# Altium PCB foc.PcbDoc (part 1 of 2)
Units mil, origin at the board's own origin, x right, y up, seen from the top; angles counter-clockwise.
Board outline 2814.98 x 1889.76 mil, 4 copper layers (Top Layer, GND, VCC, Bottom Layer), stack 23.756 mil thick; 125 components, 87 nets, 460 pads, 520 vias.
Unrouted connection lines stored in the file: 133.
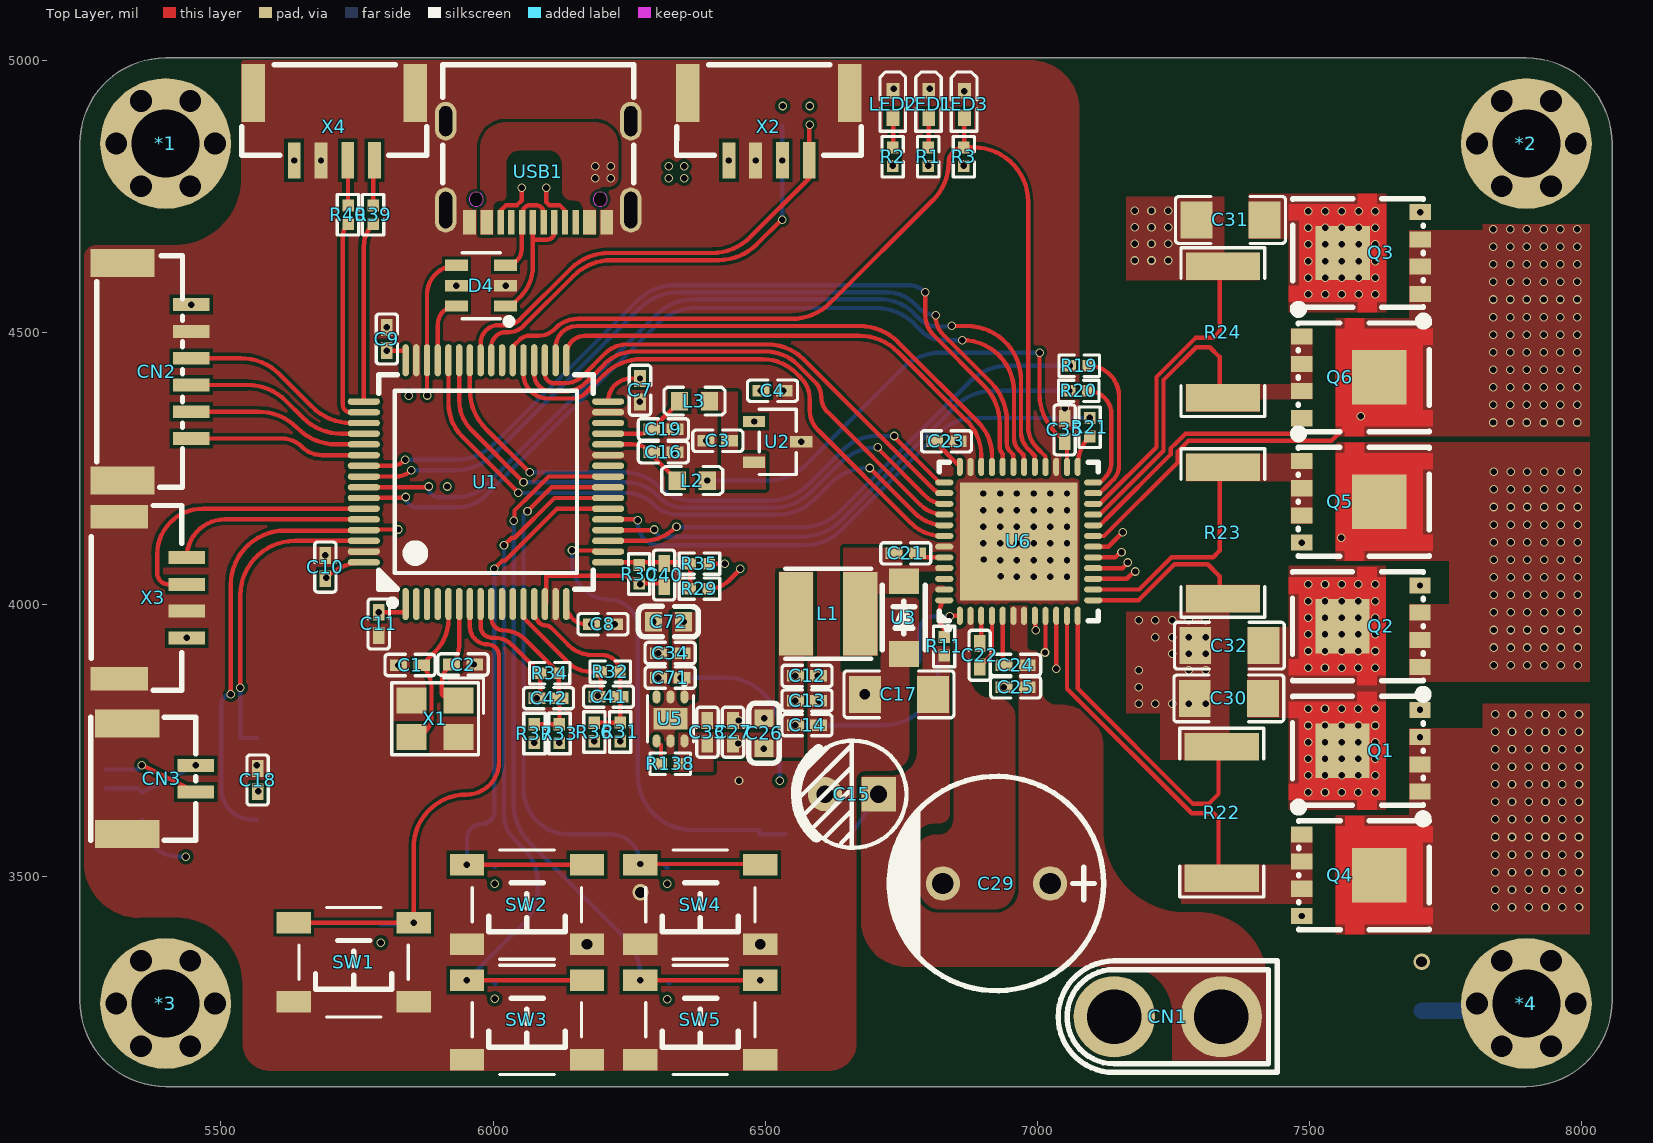
[diagram p0: Top Layer view]
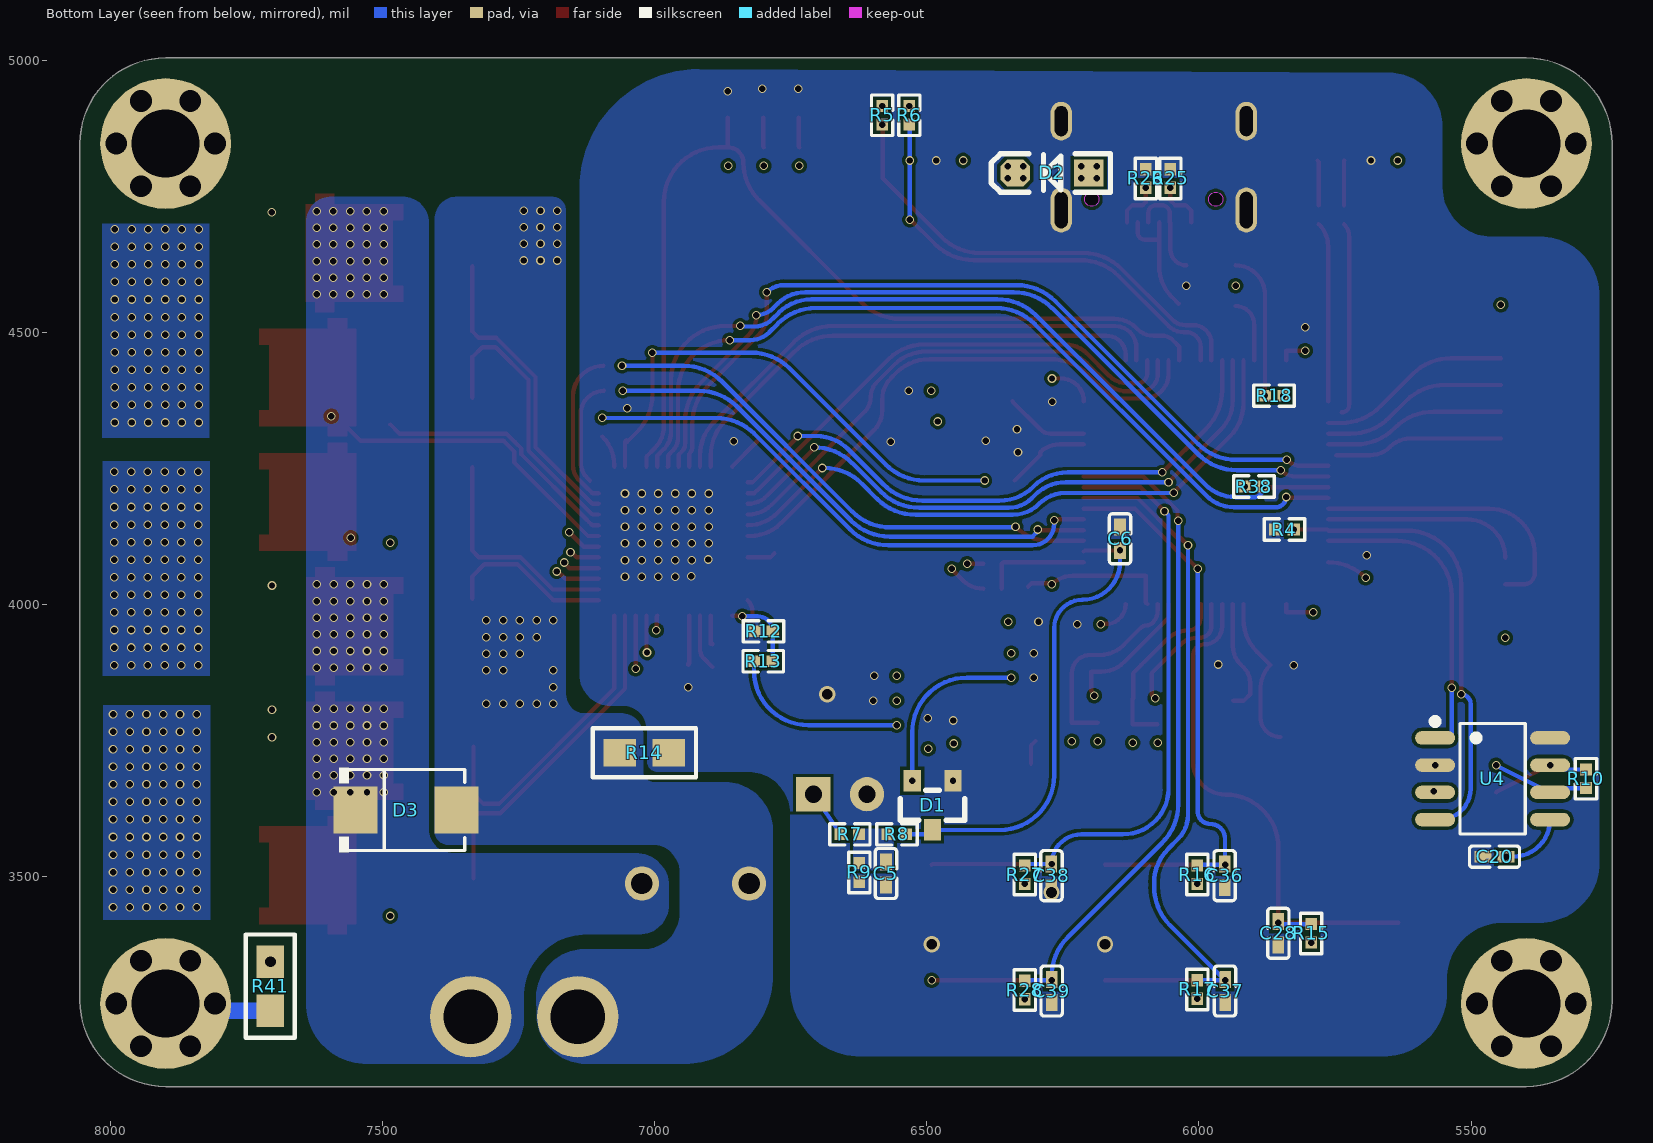
[diagram p1: Bottom Layer view, seen from below]
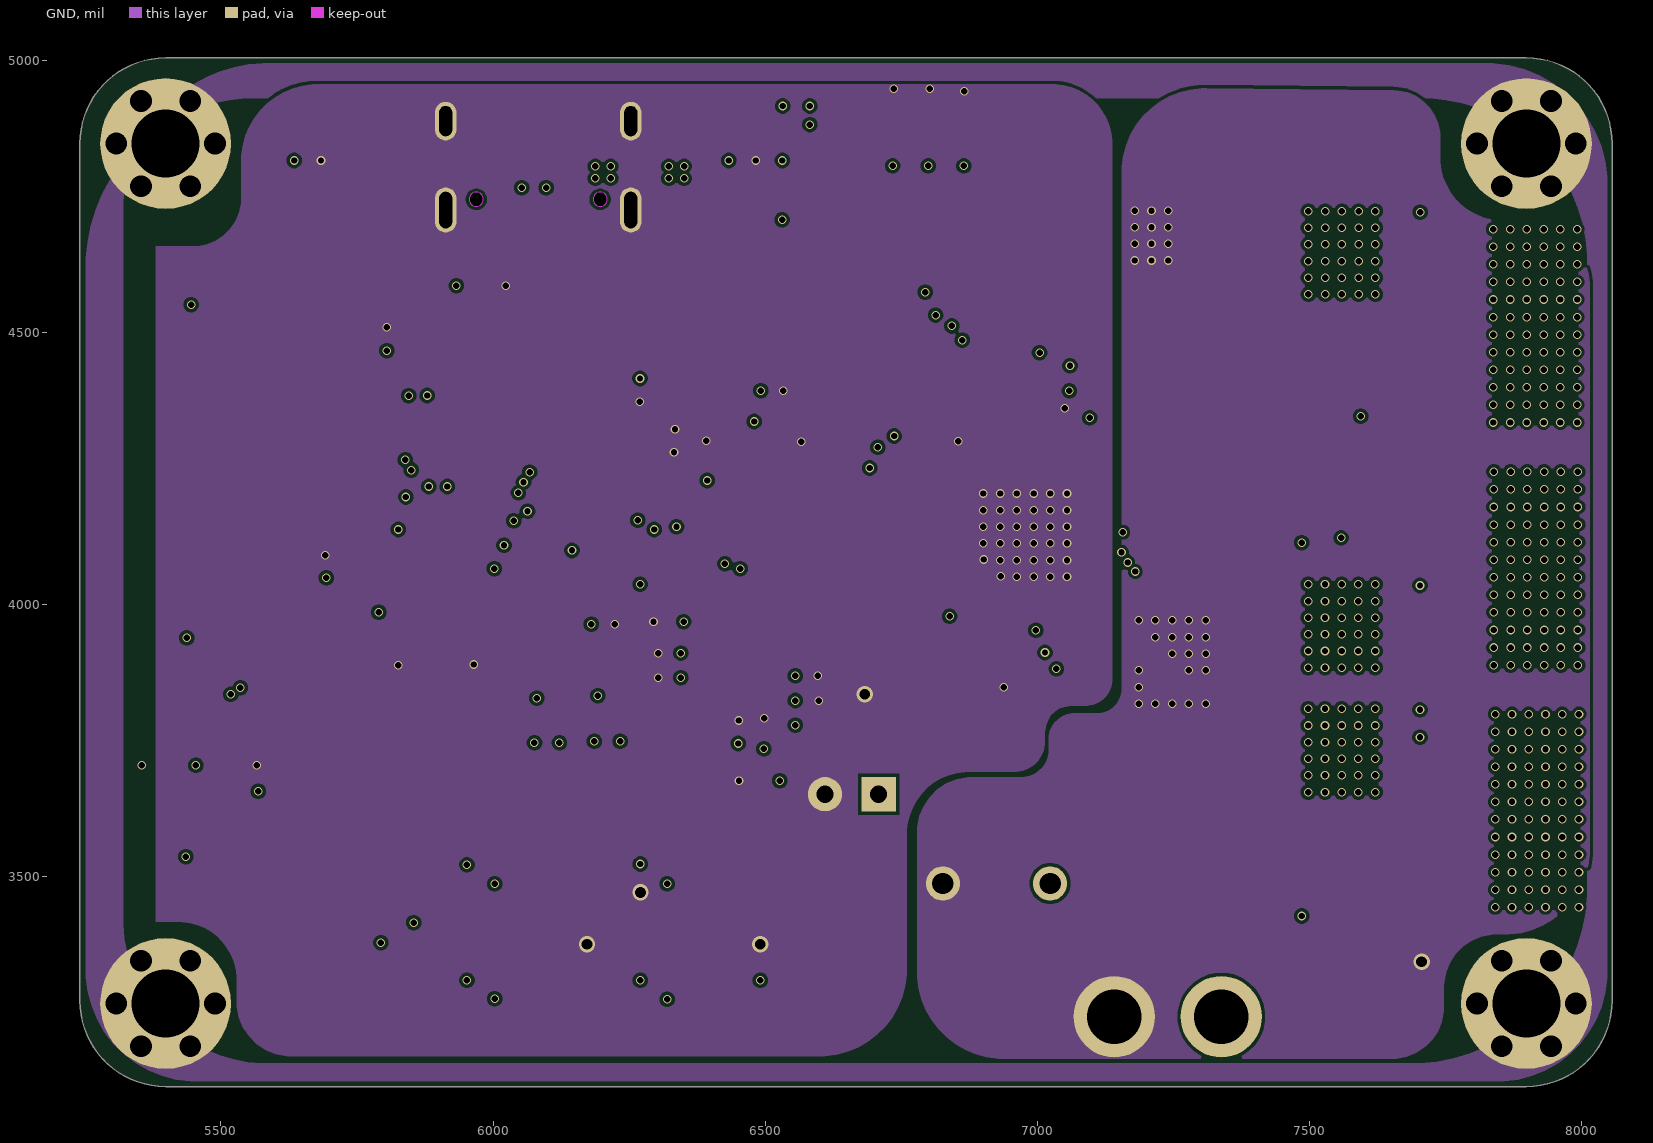
[diagram p2: GND]
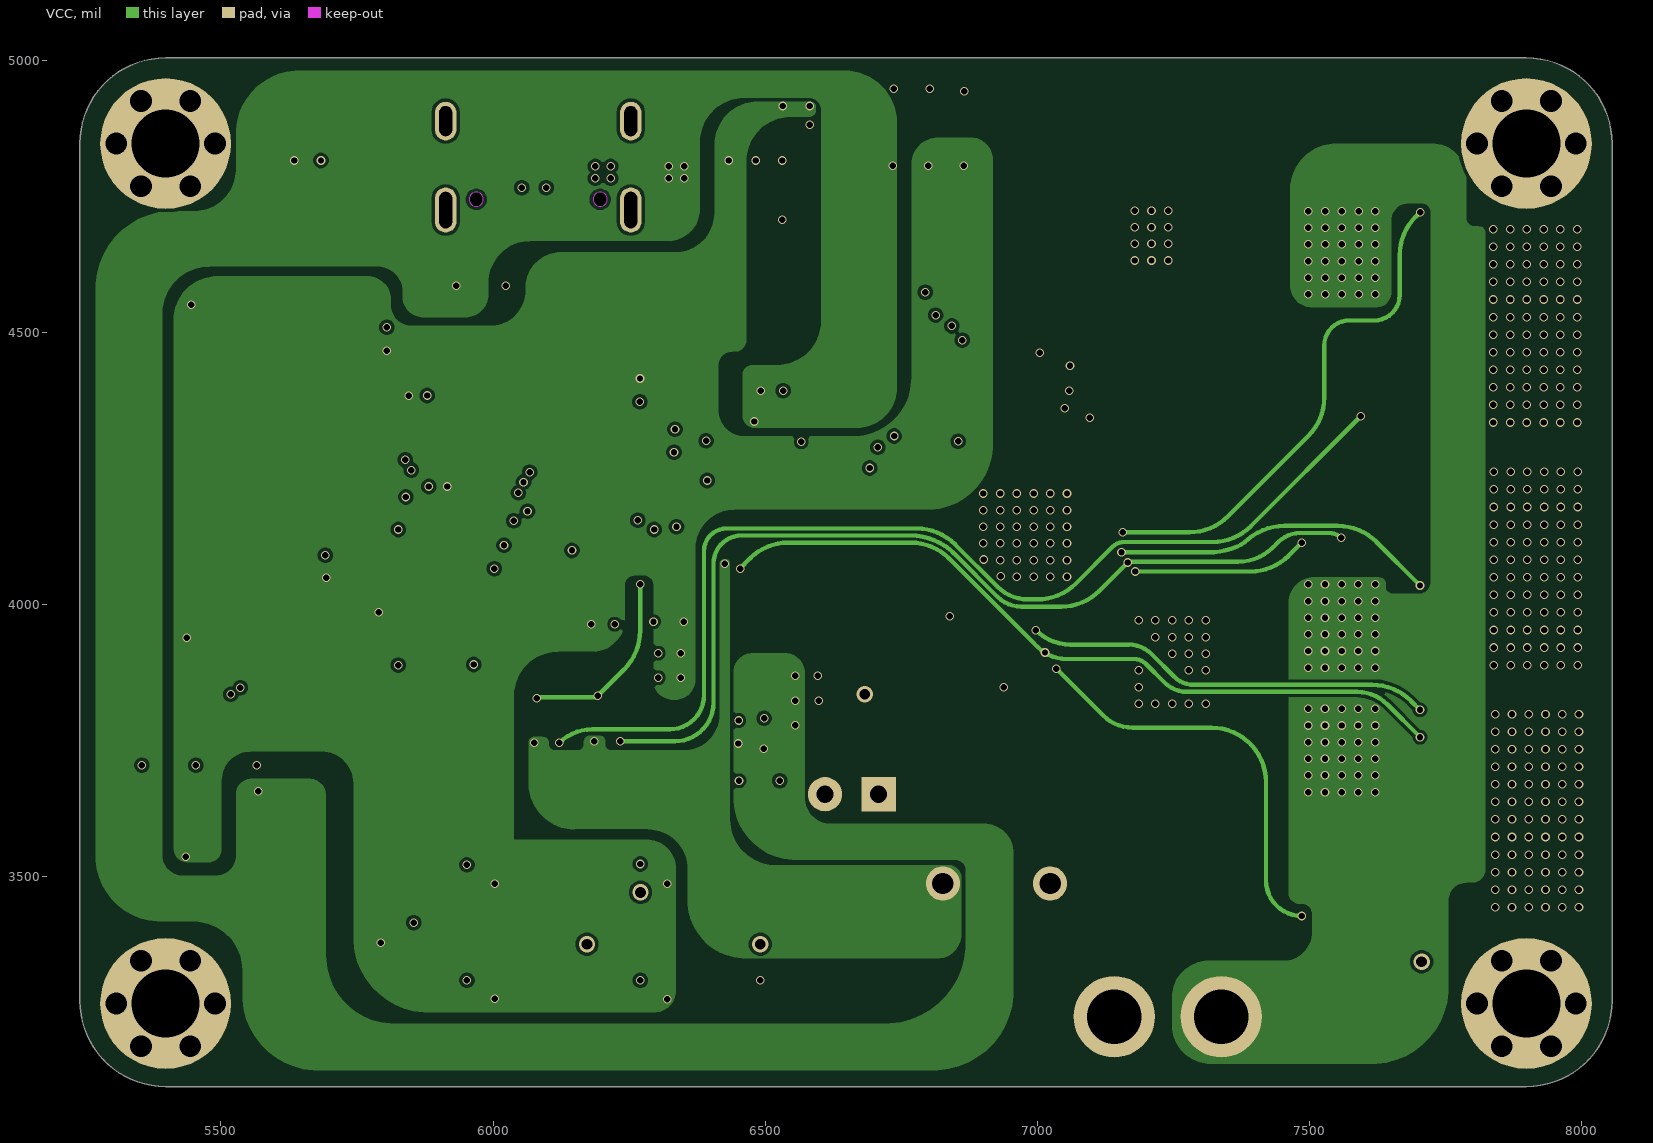
[diagram p3: VCC]

## Layer stack, top to bottom
Top Solder: solder mask 0.4, Solder Resist, Dk 3.5
Top Layer: signal copper 1.4
Dielectric 2: prepreg 2.8, PP-006, Dk 4.1
GND: signal copper 1.378
Dielectric 1: dielectric 12.6, FR-4, Dk 4.8
VCC: signal copper 1.378
Dielectric 3: prepreg 2.8, PP-006, Dk 4.1
Bottom Layer: signal copper 1.4
Bottom Solder: solder mask 0.4, Solder Resist, Dk 3.5

## Board outline
5240.95,3272.2 5240.95,4847 cw(c5398.43,4847) 5398.43,5004.48 7898.45,5004.48 cw(c7898.45,4847) 8055.93,4847 8055.93,3272.2 cw(c7898.45,3272.2) 7898.45,3114.72 5398.43,3114.72 cw(c5398.43,3272.2)
cut-out: 0,0 10,0 10,10 0,10
cut-out: 0,0 10,0 10,10 0,10
cut-out: 0,0 10,0 10,10 0,10
cut-out: 0,0 10,0 10,10 0,10
cut-out: 0,0 10,0 10,10 0,10
cut-out: 0,0 10,0 10,10 0,10
cut-out: 0,0 10,0 10,10 0,10
cut-out: 0,0 10,0 10,10 0,10
cut-out: 0,0 10,0 10,10 0,10
cut-out: 0,0 10,0 10,10 0,10
cut-out: 0,0 10,0 10,10 0,10
cut-out: 0,0 10,0 10,10 0,10

## Design rules (kind name [scope] priority, off if disabled: settings)
Clearance [All] p1: gap=6 ignorepadtopadclearanceinfootprint=FALSE except(5: Arc-Arc Arc-Track Arc-SMDPad Track-Track Track-SMDPad)
ComponentClearance [All] p1: gap=0 collisioncheckmode=3 verticalgap=0 showdistances=FALSE
DiffPairsRouting [InDifferentialPair('No Differential Pair')] p1: maxlimit=500 minlimit=6 mostfreqgap=6 toplayer_minwidth=6 toplayer_maxwidth=11 toplayer_prefwidth=8 midlayer1_minwidth=6 midlayer1_maxwidth=11 midlayer1_prefwidth=8 midlayer2_minwidth=6 midlayer2_maxwidth=11 midlayer2_prefwidth=8 bottomlayer_minwidth=6 bottomlayer_maxwidth=11 bottomlayer_prefwidth=8 maxuncoupledlength=500
PlaneConnect [All] p1: planeconnectstyle=Direct reliefexpansion=20 reliefentries=4 reliefconductorwidth=10 reliefairgap=10
PolygonConnect [All] p1: connectstyle=Direct reliefconductorwidth=10 reliefentries=4 polygonreliefangle="90 Angle" airgapwidth=10
RoutingVias [All] p1: holewidth=28 width=50 viastyle="Through Hole" minholewidth=8 minwidth=8 maxholewidth=900 maxwidth=900
SolderMaskExpansion [IsVia] p1: expansion=4
SupplyNets "Schematic Supply Nets_4" [InNet('3.3V')] p1: voltage=0.000
SupplyNets "Schematic Supply Nets_3" [InNet('SNA')] p2: voltage=0.000
SupplyNets "Schematic Supply Nets_2" [InNet('VREF')] p3: voltage=0.000
SupplyNets "Schematic Supply Nets_1" [InNet('5V')] p4: voltage=0.000
SupplyNets "Schematic Supply Nets" [InNet('GND')] p5: voltage=0.000
Width [All] p1: maxlimit=500 minlimit=6 preferedwidth=8 toplayer_maxwidth=8 bottomlayer_maxwidth=8 minimp=50.000000 maximp=50.000000 favimp=50.000000
27 further rules are at their usual default settings.

## Components (designator, comment, footprint, x,y, rotation, side; value= is the part's Value field where it differs from the comment)
*1 "M3_1" "M3 125X250" 5398.43,4847 r0 top
*2 "M3_1" "M3 125X250" 7898.45,4847 r0 top
*3 "M3_1" "M3 125X250" 5398.43,3267.2 r0 top
*4 "M3_1" "M3 125X250" 7898.45,3267.2 r0 top
C1 "15pf" C0402 5847.54,3889 r0 top
C2 "15pf" C0402 5945,3890 r0 top
C3 "1uf" C0402 6413,4301 r180 top
C4 "1uf" C0402 6513.54,4393 r0 top
C5 "100nf" C0402 6575,3506 r270 bottom
C6 "100nf" C0402 6145,4121 r90 bottom
C7 "100nf" C0402 6270,4394 r270 top
C8 "100nf" C0402 6202,3964 r0 top
C9 "100nf" C0402 5805,4488 r90 top
C10 "100nf" C0402 5692,4069 r90 top
C11 "100nf" C0402 5790,3964.54 r270 top
C12 "22uf" C0402 6576.8,3869.07 r0 top
C13 "22uf" C0402 6576.8,3823.81 r0 top
C14 "1uf" C0402 6576.8,3778.55 r0 top
C15 "PA50V220M10x12" "CAP 2.5*5*11" 6659.14,3651.68 r180 top
C16 "1uf" C0402 6313,4280 r180 top
C17 "1uf" C1206 6745.8,3835.27 r180 top
C18 "100nf" C0402 5567.53,3677.72 r270 top
C19 "1uf" C0402 6313,4322 r0 top
C20 "100nf" C0402 5457,3537 r180 bottom
C21 "100nf" C0402 6758.34,4094.27 r180 top
C22 "47nf" C0402 6894,3907 r90 top
C23 "1uf" C0402 6833,4300 r0 top
C24 "1uf" C0402 6960,3889 r180 top
C25 "1uf" C0402 6960,3848 r0 top
C26 "10uf/10V" C0603 6497.89,3763.63 r270 top
C27 "1uf/10V" C0402 6440.89,3765.63 r270 top
C28 "100nf" C0402 5854.1,3396.15 r90 bottom
C29 "PA50V220M10x12" CAP-TH_BD10.0-P5.00-D0.6-FD_2 6924.92,3487.68 r180 top
C30 "1uf" C1206 7351.8,3827.65 r0 top
C31 "1uf" C1206 7354.8,4706.65 r0 top
C32 "1uf" C1206 7352.8,3924.65 r0 top
C33 "100nf" C0402 6393.89,3765.63 r270 top
C34 "100nf" C0402 6325.36,3911.04 r0 top
C35 "100nf" C0402 7050,4321 r90 top
C36 "100nf" C0402 5952.86,3502.15 r90 bottom
C37 "100nf" C0402 5952.08,3290.15 r90 bottom
C38 "100nf" C0402 6271.02,3502.15 r90 bottom
C39 "100nf" C0402 6270.53,3290.15 r90 bottom
C40 "47nf" C0402 6314.21,4054.33 r270 top
C41 "47nf" C0402 6212.16,3831 r180 top
C42 "47nf" C0402 6102,3828.16 r180 top
C71 "1uf/10V" C0402 6325.36,3865.78 r0 top
C72 "10uf/6.3V" C0603 6322.52,3968.63 r0 top
CN1 "XT30U-M" CONN-TH_XT30U-M 7239.58,3243 r180 top
CN2 "A1257WR-S-6P" CONN-SMD_A1257WR-S-6P 5382.23,4428.12 r270 top
CN3 "GH125-S02DCA-00" GH1.25-2P-卧贴 5454.1,3704.72 r270 top
D1 "LBAT54SLT1G" SOT-23_L2.9-W1.3-P1.90-LS2.4-BR 6489.32,3631.32 r90 bottom
D2 "DSS34" SOD-123 6270,4793 r0 bottom
D3 "SMBJ60A_C49066953" SMB_L4.5-W3.7-LS5.4-RD 7456.8,3622.65 r180 bottom
D4 "USBLC6-2SC6_C2827654" SOT-23-6_L2.9-W1.6-P0.95-LS2.8-BL 5978,4586 r90 top
L1 "FNR4020S620MT" IND-SMD_L4.0-W4.0_FNR40XXS 6615.8,3983.27 r180 top
L2 "600R@100MHz" L0603 6366,4228 r180 top
L3 "600R@100MHz" L0603 6370,4374 r180 top
LED1 "XL-1005SURC" LED0402-R-RD_RED 6800.5,4919 r270 top
LED2 "XL-1005SURC" LED0402-R-RD_RED 6735,4919 r270 top
LED3 "XL-1005SURC" LED0402-R-RD_RED 6866,4919 r270 top
Q1 "NCEP0160AG" DFN-5_L4.9-W5.9-P1.27-LS6.2-BL 7631.64,3731.6 r90 top
Q2 "NCEP0160AG" DFN-5_L4.9-W5.9-P1.27-LS6.2-BL 7631.64,3960.2 r90 top
Q3 "NCEP0160AG" DFN-5_L4.9-W5.9-P1.27-LS6.2-BL 7632,4646 r90 top
Q4 "NCEP0160AG" DFN-5_L4.9-W5.9-P1.27-LS6.2-BL 7557,3503 r270 top
Q5 "NCEP0160AG" DFN-5_L4.9-W5.9-P1.27-LS6.2-BL 7556.8,4188.8 r270 top
Q6 "NCEP0160AG" DFN-5_L4.9-W5.9-P1.27-LS6.2-BL 7556.8,4417.4 r270 top
R1 "10k" R0402 6799.5,4823 r270 top
R2 "10k" R0402 6734,4823 r270 top
R3 "10k" R0402 6865,4823 r270 top
R4 "10k" R0402 5843,4138 r180 bottom
R5 "10k" R0402 6582,4898.96 r90 bottom
R6 "10k" R0402 6532,4899 r90 bottom
R7 "10k" R0402 6641.32,3578 r0 bottom
R8 "10R" R0402 6554.96,3578 r0 bottom
R9 "1K" R0402 6624,3508 r90 bottom
R10 "120r" R0402 5289,3680 r90 bottom
R11 "100k" R0402 6828.8,3923.27 r270 top
R12 "10k" R0402 6799.96,3951 r180 bottom
R13 "54.9k" R0402 6800.45,3895.89 r180 bottom
R14 "0R" 0805R 7064,3728 r180 bottom
R15 "10k" R0402 5794,3396 r270 bottom
R16 "10k" R0402 6003,3504 r270 bottom
R17 "10k" R0402 6003,3293 r270 bottom
R18 "1.5k" R0402 5862,4384 r180 bottom
R19 "33R" R0402 7076.96,4438.81 r0 top
R20 "33R" R0402 7075.96,4392.81 r0 top
R21 "33R" R0402 7096,4325.96 r270 top
R22 "HoYLR2512-2W-5mR-1%" R2512 7338.8,3617.93 r270 top
R23 "HoYLR2512-2W-5mR-1%" R2512 7340.8,4131.65 r90 top
R24 "HoYLR2512-2W-5mR-1%" R2512 7340.8,4500.65 r270 top
R25 "5.1k" R0402 6052.63,4782.91 r270 bottom
R26 "5.1k" R0402 6097.63,4782.91 r270 bottom
R27 "10k" R0402 6320,3504 r270 bottom
R28 "10k" R0402 6320,3292 r270 bottom
R29 "10k" R0402 6379.21,4029.33 r0 top
R30 "1k" R0402 6268.37,4056.09 r270 top
R31 "10k" R0402 6233.53,3766.09 r270 top
R32 "1k" R0402 6215.16,3876.84 r180 top
R33 "10k" R0402 6122,3763.16 r270 top
R34 "1k" R0402 6104,3874 r180 top
R35 "1k" R0402 6379.21,4075.33 r180 top
R36 "1k" R0402 6186.16,3766 r90 top
R37 "1k" R0402 6076.09,3763.2 r90 top
R38 "10k" R0402 5899.04,4217 r0 bottom
R39 "100R" R0402 5779.63,4716.09 r270 top
R40 "100R" R0402 5733.63,4716.09 r270 top
R41 "1M" 0805R 7706,3344 r270 bottom
R138 "10k" R0402 6325.52,3707.63 r180 top
SW1 "smd-4*4*1.5" "TSW SMD-4*4*1.5" 5743.87,3343 r180 top
SW2 "smd-4*4*1.5" "TSW SMD-4*4*1.5" 6062.32,3449 r180 top
SW3 "smd-4*4*1.5" "TSW SMD-4*4*1.5" 6062.32,3237 r180 top
SW4 "smd-4*4*1.5" "TSW SMD-4*4*1.5" 6380.76,3449 r180 top
SW5 "smd-4*4*1.5" "TSW SMD-4*4*1.5" 6380.76,3237 r180 top
U1 "STM32G474RET6" LQFP-64_L10.0-W10.0-P0.50-LS12.0-BL 5987,4225 r0 top
U2 "REF3033AIDBZR" SOT-23-3_L3.0-W1.7-P0.95-LS2.9-BR 6523,4299 r180 top
U3 "DSK16_C22466351" SOD-123FL_L2.8-W1.9-LS3.7-RD 6754.8,3976.27 r270 top
U4 "TJA1051T/3" SOP-8_L4.9-W3.9-P1.27-LS6.0-BL-1 5460.53,3680.12 r270 bottom
U5 "LP5912-3.3DRVR" WSON-6_L2.0-W2.0-P0.65-TL-EP 6326,3790 r270 top
U6 "DRV8323RSRGZT" VQFN-48_L7.0-W7.0-P0.50-BL-EP5.5 6965.8,4116.27 r0 top
USB1 "TYPE-C16PIN" USB-C-SMD_TYPE-C16PIN 6083,4795.31 r180 top
X1 "XL2EL89CSI-111YLC-25M" CRYSTAL-SMD_4P-L3.2-W2.5-BL 5893.62,3790.22 r180 top
X2 "GH125-S04CCA-00" GH1.25-4P-卧贴 6571.5,4831.59 r180 top
X3 "GH125-S04CCA-00" GH1.25-4P-卧贴 5421.76,4077.12 r270 top
X4 "GH125-S04CCA-00" GH1.25-4P-卧贴 5773,4831.59 r180 top

## Footprints (in the part's own frame and the unit in brackets; to place one, negate y for a bottom-side part, rotate by r counter-clockwise, add the part's x,y. Pads: shape width x height; smd on the part's side, far side on the other; paste and mask are expansions set on the pad)
0805R [mil]
  rect 60x50 smd: 1(0,0) 2(90,0)
  silkscreen extent -50,-45 140,45, body extent 5,-25 83,25, height 22
C0402 [mm]
  rect 0.79x0.54 smd mask+0.051: 1(-0.545,0) 2(0.545,0)
  silkscreen extent -1.17,-0.5 1.17,0.5
C0603 [mm]
  rect 0.8x0.9 smd: 1(-0.7,0) 2(0.7,0)
  silkscreen extent -1.41,-0.71 1.39,0.72
C1206 [mm]
  rect 1.485x1.728 smd: 1(-1.593,0) 2(1.593,0)
  silkscreen extent -2.56,-1.09 2.56,1.09
"CAP 2.5*5*11" [mm] "脚距2.5mm直径5mm高度11mm"
  rect 1.6x1.6 hole 0.8: 1(-1.25,0)
  round 1.6 hole 0.8: 2(1.25,0)
  silkscreen extent -2.55,-2.5 2.6,2.5, body extent -2.5,-2.5 2.51,2.5, height 11.03
CAP-TH_BD10.0-P5.00-D0.6-FD_2 [mm]
  round 1.6 hole 1 mask+0.102: 1(-2.5,0) 2(2.5,0)
  silkscreen extent -5,-5 5.08,5
CONN-SMD_A1257WR-S-6P [mm]
  rect 0.6x1.7 smd mask+0.102: 1(3.124,1.6) 2(1.875,1.6) 3(0.625,1.6) 4(-0.625,1.6) 5(-1.875,1.6) 6(-3.124,1.6)
  rect 1.3x3 smd mask+0.102: 7(5.075,-1.6) 8(-5.075,-1.6)
  silkscreen extent -5.4,-2.8 5.4,1.2
CONN-TH_XT30U-M [mm]
  round 3.8 hole 2.54 mask+0.05: 1(-2.5,0) 2(2.5,0)
  silkscreen extent -5.1,-2.6 5.11,2.6
CRYSTAL-SMD_4P-L3.2-W2.5-BL [mm]
  rect 1.4x1.2 smd mask+0.102: 1(-1.1,-0.85) 2(1.1,-0.85) 3(1.1,0.85) 4(-1.1,0.85)
  silkscreen extent -2.26,-1.91 2.03,1.68
DFN-5_L4.9-W5.9-P1.27-LS6.2-BL [mm]
  rect 0.75x1 smd mask+0.102: 1(-1.905,-1.811) 2(-0.635,-1.811) 3(0.635,-1.811) 4(1.905,-1.811)
  rect 2.54x2.54 smd mask+0: 5(0,1.803)
  Top Layer region: -2.28,4.313 -2.28,1.113 -2.755,1.113 -2.755,0.208 -2.28,0.208 -2.28,-0.217 2.28,-0.217 2.28,0.208 2.755,0.208 2.755,1.113 2.28,1.113 2.28,4.313 1.53,4.313 1.53,3.838 -1.53,3.838 -1.53,4.313
  silkscreen extent -3.37,-2.16 2.54,4.14
GH1.25-2P-卧贴 [mm]
  rect 0.6x1.7 smd: 1(1.25,0) 2(0,0)
  rect 1.3x3 smd: 3(3.2,-3.2) 4(-1.95,-3.2)
  silkscreen extent -2.25,-4.9 3.5,0
GH1.25-4P-卧贴 [mm]
  rect 0.6x1.7 smd: 1(3.513,0.396) 2(2.263,0.396) 3(1.013,0.396) 4(-0.237,0.396)
  rect 1.1x2.7 smd: 5(5.423,-2.754) 6(-2.137,-2.754)
  silkscreen extent -2.67,-4.06 5.95,0.16
IND-SMD_L4.0-W4.0_FNR40XXS [mm]
  rect 1.6x3.9 smd mask+0.102: 1(-1.5,0) 2(1.5,0)
  silkscreen extent -2,-2.1 2,2.1
L0603 [mm]
  rect 0.8x0.864 smd mask+0.051: 1(-0.7,0) 2(0.7,0)
  silkscreen extent -1.42,-0.65 1.42,0.65
LED0402-R-RD_RED [mm]
  rect 0.75x0.6 smd mask+0.102: 1(0.623,0) 2(-0.623,0)
  silkscreen extent -1.51,-0.61 1.26,0.58
LQFP-64_L10.0-W10.0-P0.50-LS12.0-BL [mm]
  oval 0.3x1.5 smd mask+0.102: 1(-3.75,-5.688) 2(-3.25,-5.688) 3(-2.75,-5.688) 4(-2.25,-5.688) 5(-1.75,-5.688) 6(-1.25,-5.688) 7(-0.75,-5.688) 8(-0.25,-5.688) 9(0.25,-5.688) 10(0.75,-5.688) 11(1.25,-5.688) 12(1.75,-5.688) 13(2.25,-5.688) 14(2.75,-5.688) 15(3.25,-5.688) 16(3.75,-5.688) 33(3.75,5.688) 34(3.25,5.688) 35(2.75,5.688) 36(2.25,5.688) 37(1.75,5.688) 38(1.25,5.688) 39(0.75,5.688) 40(0.25,5.688) 41(-0.25,5.688) 42(-0.75,5.688) 43(-1.25,5.688) 44(-1.75,5.688) 45(-2.25,5.688) 46(-2.75,5.688) 47(-3.25,5.688) 48(-3.75,5.688)
  oval 1.5x0.3 smd mask+0.102: 17(5.7,-3.738) 18(5.7,-3.238) 19(5.7,-2.738) 20(5.7,-2.238) 21(5.7,-1.738) 22(5.7,-1.238) 23(5.7,-0.738) 24(5.7,-0.238) 25(5.7,0.262) 26(5.7,0.762) 27(5.7,1.262) 28(5.7,1.762) 29(5.7,2.262) 30(5.7,2.762) 31(5.7,3.262) 32(5.7,3.762) 49(-5.7,3.762) 50(-5.7,3.262) 51(-5.7,2.762) 52(-5.7,2.262) 53(-5.7,1.762) 54(-5.7,1.262) 55(-5.7,0.762) 56(-5.7,0.262) 57(-5.7,-0.238) 58(-5.7,-0.738) 59(-5.7,-1.238) 60(-5.7,-1.738) 61(-5.7,-2.238) 62(-5.7,-2.738) 63(-5.7,-3.238) 64(-5.7,-3.738)
  silkscreen extent -5,-5.78 5,5.01
"M3 125X250" [mil] "M3螺丝孔，孔125Mil，焊盘300Mil"
  round 35 hole 40: 1(-90.55,0) 1(-45.28,-78.42) 1(-45.28,78.42) 1(45.28,-78.42) 1(45.28,78.42) 1(90.55,0)
  round 240.16 hole 125: 1(0,0)
R0402 [mm]
  rect 0.566x0.54 smd: 1(-0.433,0) 2(0.433,0)
  silkscreen extent -0.94,-0.5 0.94,0.5
R2512 [mil]
  rect 50.49x136.06 smd mask+2: 1(-120.72,0) 2(120.72,0)
  silkscreen extent -155,-77 155,77
SMB_L4.5-W3.7-LS5.4-RD [mil]
  rect 80.61x86.31 smd mask+4: 1(-92.94,0) 2(92.94,0)
  silkscreen extent -123,-77 108,77
SOD-123 [mil] "2.7x1.6X1.1mm（长宽高，不包括引脚）"
  rect 55x50 smd: 1(-67.5,0)
  oct 55x50 smd: 2(67.5,0)
  silkscreen extent -108,-35 112,35, body extent -73,-31 73,31, height 48
SOD-123FL_L2.8-W1.9-LS3.7-RD [mm]
  rect 1.2x1.4 smd mask+0.102: 1(-1.7,0) 2(1.7,0)
  silkscreen extent -1.5,-1 1.5,1
SOP-8_L4.9-W3.9-P1.27-LS6.0-BL-1 [mm]
  oval 0.63x1.865 smd mask+0.102: 1(-1.905,-2.683) 2(-0.635,-2.683) 3(0.635,-2.683) 4(1.905,-2.683) 5(1.905,2.682) 6(0.635,2.682) 7(-0.635,2.682) 8(-1.905,2.682)
  silkscreen extent -2.82,-2.83 2.58,1.52
SOT-23-3_L3.0-W1.7-P0.95-LS2.9-BR [mil]
  rect 40.85x20.95 smd mask+4: 1(43.36,-37.4) 2(43.36,37.4) 3(-43.36,0)
  silkscreen extent -34,-60 34,60
SOT-23-6_L2.9-W1.6-P0.95-LS2.8-BL [mil]
  rect 20.95x42.2 smd mask+4: 1(-37.4,-45.24) 2(0,-45.24) 3(37.4,-45.24) 4(37.4,45.24) 5(0,45.24) 6(-37.4,45.24)
  silkscreen extent -72,-57 61,35
SOT-23_L2.9-W1.3-P1.90-LS2.4-BR [mm]
  rect 1x0.8 smd mask+0.102: 1(1.15,-0.95) 2(1.15,0.95) 3(-1.15,0)
  silkscreen extent -0.7,-1.5 0.7,1.5
"TSW SMD-4*4*1.5" [mm] "轻触开关，长宽高：4*4*1.5mm"
  rect 1.6x1 smd: 1(-2.8,1.85) 2(-2.8,-1.85) 3(2.8,-1.85) 4(2.8,1.85)
  silkscreen extent -2.55,-2.55 2.55,2.55, body extent -3.2,-2.6 3.2,2.6, height 1.5
USB-C-SMD_TYPE-C16PIN [mm]
  oval 1x2.1 hole 0.6 slot 1.7 at 90 deg mask+0.102: 1(-4.32,1.787) 2(4.32,1.787)
  oval 1x1.8 hole 0.6 slot 1.4 at 90 deg mask+0.102: 3(-4.32,-2.362) 4(4.32,-2.362)
  rect 0.6x1.15 smd mask+0.051: A1B12(-3.2,2.362) A4B9(-2.4,2.362) B1A12(3.2,2.362) B4A9(2.4,2.362)
  rect 0.3x1.15 smd mask+0.051: A5(-1.25,2.362) A6(-0.25,2.362) A7(0.25,2.362) A8(-1.75,2.362) B5(1.75,2.362) B6(0.75,2.362) B7(-0.75,2.362) B8(1.25,2.362)
  Keep-Out Layer board cut-out: -2.565,1.288 -2.565,1.353 -2.614,1.472 -2.706,1.564 -2.825,1.613 -2.955,1.613 -3.074,1.564 -3.166,1.472 -3.215,1.353 -3.215,1.288 -3.215,1.223 -3.166,1.104 -3.074,1.013 -2.955,0.963 -2.825,0.963 -2.706,1.013 -2.614,1.104 -2.565,1.223 -2.565,1.288
  Keep-Out Layer board cut-out: 3.215,1.288 3.215,1.353 3.166,1.472 3.074,1.564 2.955,1.613 2.825,1.613 2.706,1.564 2.614,1.472 2.565,1.353 2.565,1.288 2.565,1.223 2.614,1.104 2.706,1.013 2.825,0.963 2.955,0.963 3.074,1.013 3.166,1.104 3.215,1.223 3.215,1.288
  silkscreen extent -4.45,-5 4.45,0.52
VQFN-48_L7.0-W7.0-P0.50-BL-EP5.5 [mm]
  oval 0.28x0.85 smd mask+0.05: 1(-2.75,-3.475) 2(-2.25,-3.475) 3(-1.75,-3.475) 4(-1.25,-3.475) 5(-0.75,-3.475) 6(-0.25,-3.475) 7(0.25,-3.475) 8(0.75,-3.475) 9(1.25,-3.475) 10(1.75,-3.475) 11(2.25,-3.475) 12(2.75,-3.475) 25(2.75,3.475) 26(2.25,3.475) 27(1.75,3.475) 28(1.25,3.475) 29(0.75,3.475) 30(0.25,3.475) 31(-0.25,3.475) 32(-0.75,3.475) 33(-1.25,3.475) 34(-1.75,3.475) 35(-2.25,3.475) 36(-2.75,3.475)
  oval 0.85x0.28 smd mask+0.05: 13(3.475,-2.75) 14(3.475,-2.25) 15(3.475,-1.75) 16(3.475,-1.25) 17(3.475,-0.75) 18(3.475,-0.25) 19(3.475,0.25) 20(3.475,0.75) 21(3.475,1.25) 22(3.475,1.75) 23(3.475,2.25) 24(3.475,2.75) 37(-3.475,2.75) 38(-3.475,2.25) 39(-3.475,1.75) 40(-3.475,1.25) 41(-3.475,0.75) 42(-3.475,0.25) 43(-3.475,-0.25) 44(-3.475,-0.75) 45(-3.475,-1.25) 46(-3.475,-1.75) 47(-3.475,-2.25) 48(-3.475,-2.75)
  rect 5.5x5.5 smd mask+0.05: 49(0,0)
  silkscreen extent -3.7,-4.16 3.7,3.7
WSON-6_L2.0-W2.0-P0.65-TL-EP [mm]
  oval 0.607x0.364 smd mask+0.102: 1(-1.028,0.65) 2(-1.028,0) 3(-1.028,-0.65) 4(1.028,-0.65) 5(1.028,0) 6(1.028,0.65)
  rect 1x1.6 smd mask+0.102: 7(0,0)
  silkscreen extent -1.71,-1.08 1.08,1.08

## Part data
*1 *2 *3 *4: "铜柱孔"
C1 C2 C3 C4 C5 C6 C7 C8 C9 C10 C11 C12 C13 C14 C16 C17 C18 C19 C20 C21 C22 C23 C24 C25 C26 C27 C28 C30 C31 C32 C33 C34 C35 C36 C37 C38 C39 C40 C41 C42 C71 C72: library part C, "无极性电容"
C15 C29: library part 电解电容M10*12, "容值:220uF;精度:±20%;额定电压:50V;纹波电流:3.5A@100kHz;等效串联电阻(ESR):20mΩ@100kHz;类型:聚合物;"
CN2: library part GH1.25-6P, "插针结构:1x6P;间距:1.25mm;安装方式:-;行距:-;总PIN数:6P;排数:1;每排PIN数:6;参考系列:GH;触头材质:黄铜;"
CN3: library part GH125-2p
D1: "正向压降(Vf):400mV;直流反向耐压(Vr):30V;整流电流:200mA;"
D2: library part 二极管, "Diode 1N series"
D3: "极性:单向;反向截止电压(Vrwm):60V;钳位电压:96.8V;峰值脉冲电流(Ipp):6.2A;峰值脉冲功率(Ppp):600W;击穿电压:73.7V;"
D4: "极性:-;反向截止电压(Vrwm):-;最大钳位电压:-;峰值脉冲电流(Ipp)@10/1000us:-;峰值脉冲功率(Ppp)@10/1000us:-;击穿电压:-;"
L1: "电感值:62uH;精度:±20%;额定电流:520mA;饱和电流(Isat):710mA;类型:磁胶屏蔽电感;"
L2 L3: library part L_1, "电感"
LED1 LED2 LED3: library part LED_1, "发光颜色:红色;功率:55mW;正向电流:25mA;主波长:620nm;透镜颜色:无色透明透镜;色温:6000K~7000K;发光角度:120°;载带方式:正贴;工作温度:-30~+85;"
Q1 Q2 Q3 Q4 Q5 Q6: "数量:1个N沟道;漏源电压(Vdss):100V;连续漏极电流(Id):60A;导通电阻(RDS(on)):11mΩ@4.5V,30A;耗散功率(Pd):105W;阈值电压(Vgs(th)):1V;"
R1 R2 R3 R4 R5 R6 R7 R8 R9 R10 R11 R12 R13 R14 R15 R16 R17 R18 R19 R20 R21 R25 R26 R27 R28 R29 R30 R31 R32 R33 R34 R35 R36 R37 R38 R39 R40 R41 R138: library part R, "电阻"
R22 R23 R24: "电阻类型:采样电阻;阻值:5mΩ;精度:±1%;功率:2W;安装方式:贴片;"
SW1 SW2 SW3 SW4 SW5: library part "TSW DIP-6x6", "轻触开关"
U1: "CPU内核:ARM-M4;CPU最大主频:170MHz;应用领域:-;"
U2: "输出类型:固定;工作电压:3.35V~5.5V;输出电压:3.3V;输出电流:25mA;精度:±0.2%;"
U3: "二极管配置:独立式;正向压降(Vf):700mV@1A;直流反向耐压(Vr):60V;整流电流:1A;"
U5: "输出类型:固定;最大输入电压:6.5V;输出电压:3.3V;输出电流:500mA;输出极性:正极;"
U6: "DRV8323R 具有降压稳压器和电流分流放大器的最大 65V 三相智能栅极驱动器"
USB1: "连接器类型:Type-C;标准:-;公母:母;端口数量:1;触点数量:16P;安装方式:卧贴;额定电流 - 电源:3A;工作温度范围:-40~+85;"
X1: "频率:16MHz;负载电容:12pF;频率公差:±10ppm;"
X2 X3 X4: library part GH1.25-4P_1, "插针结构:1x4P;间距:1.25mm;安装方式:立贴;行距:-;总PIN数:4P;排数:1;每排PIN数:4;参考系列:-;额定电流:1A;工作温度范围:-25~+85;"

## Via types
v1: diameter 15.75, hole 11.81, Top Layer to Bottom Layer, tented both sides, 515 vias
v2: diameter 30, hole 20, Top Layer to Bottom Layer, tented both sides, 5 vias

## Nets (pads, with @x,y where several pads share a name; then routed paths per layer and width w, separated by ;. In a path a pad name is that pad's centre, name@x,y a point inside that pad or via, vN(x,y) a via of type N, cw(c..) or ccw(c..) an arc to the next point about the centre after c; other vN are vias at no path point)
3.3V: C7.1 C8.1 C9.1 C10.1 C11.1 C20.2 C34.2 C71.2 C72.2 CN2.6 D1.2 R1.2 R3.2 R5.2 R6.2 R15.2 R16.2 R17.2 R18.2 R27.2 R28.2 R38.2 U1.1 U1.16 U1.32 U1.48 U1.64 U4.5 U5.1 X2.1 X3.1 | length 792.8
  Top Layer w8: C10.1@5692,4047.54 v1(5693.77,4049.32) cw(c5762.59,3980.52) U1.64@5762.59,4077.82 ; v1(5790,3986) 5839.36,3986 U1.1@5839.36,4001.05 ; v1(5805,4466.54) 5839.36,4466.54 U1.48@5839.36,4448.95 ; U1.16@6134.64,4001.05 ccw(c6171.69,4001.05) 6164.99,3964.61 6179.93,3964.61 v1(6180.54,3964) ; U1.32@6211.41,4373.1 cw(c6253.77,4373.1) 6253.77,4415.46 v1(6270,4415.46)
  Bottom Layer w8: U4.5@5354.92,3605.12 ccw(c5423.04,3605.12) 5423.04,3537 v1(5435.54,3537) ; v1(6345.04,3865.78) 6426.72,3865.78 cw(c6426.72,3765.78) 6526.72,3765.78 v1(6526.72,3676.59)
  other v1: 6320,3274.96 6003,3275.96 5794,3378.96 6003,3486.96 6320,3486.96 6345.04,3911.04 5437.35,3938.81 6350.07,3968.63 5916.08,4217 5844.96,4384 5445.22,4551.12 6799.5,4805.96 6865,4805.96 6433.2,4815.99 6532,4916.04 6582,4916
5V: C4.1 C12.1 C13.1 C14.1 C18.2 C26.2 C27.2 C33.2 D2.2 D4.5 L1.2 R2.2 R13.1 R138.1 U2.1 U4.3 U5.6 X4.1 | length 336.6
  Bottom Layer w8: v1(6555.34,3778.55) 6717.49,3778.55 ccw(c6717.49,3878.55) 6817.49,3878.55 R13.1@6817.49,3895.89
  other v1: 5568.66,3657.15 6497.52,3735.07 6450.36,3744.94 6555.34,3823.81 6555.34,3869.07 6479.64,4336.4 6492.08,4393 5932.76,4586 6323,4783 6351,4783 6323,4805 6351,4805 6734,4805.96 5634.7,4815.99
A_BEMF: C40.1 R29.1 R30.1 R35.2 U1.17 | length 197.8
  Top Layer w8: U1.17@6211.41,4077.82 6359.68,4077.82 R35.2@6362.17,4075.33 R29.1@6362.17,4029.33
B_BEMF: C41.1 R31.1 R32.1 R36.2 U1.13 | length 363.2
  Top Layer w8: U1.13@6075.58,4001.06 6075.58,3990 ccw(c6109.27,3990) 6083.41,3968.41 ccw(c6095.27,3977.43) 6085.02,3966.61 ccw(c6109.27,3990) 6085.45,3966.18 6085.82,3965.8 ccw(c6095,3974.98) 6095,3962 cw(c6095,3944.79) 6107.17,3956.96 6138.39,3925.73 ccw(c6182.48,3969.82) 6182.48,3907.47 6199.88,3907.47 cw(c6199.88,3873.83) 6233.53,3873.83 R31.1@6233.53,3783.13 6186.25,3783.13 R36.2@6186.16,3783.04
C_BEMF: C42.1 R33.1 R34.1 R37.2 U1.9 | length 333.4
  Top Layer w8: U1.9@5996.84,4001.05 5996.84,3975.67 ccw(c6020.15,3975.67) 6020.15,3952.36 cw(c6020.15,3897.96) 6058.62,3936.42 6101.41,3893.63 6101.82,3893.63 6107.1,3888.36 6107.1,3887.95 R34.1@6121.04,3874 6121.04,3828.16 6122,3827.2 R33.1@6122,3780.2 R37.2@6076.09,3780.24 R37.2@6076.09,3780.24
CAL: U1.33 U6.34 | length 918.1
  Top Layer w8: U1.33@6134.64,4448.95 6134.64,4459.28 cw(c6169.32,4459.28) 6169.32,4493.97 6672.61,4493.97 cw(c6672.61,4393.97) 6743.32,4464.68 6870.91,4337.09 cw(c6808.18,4274.35) 6896.9,4274.35 U6.34@6896.9,4253.07
CAN1_RXD: R4.2 U1.61 U4.4 | length 847.3
  Top Layer w8: v1(5518,3835) 5518,4036 cw(c5618,4036) 5618,4136 5761.71,4136 U1.61@5762.59,4136.88 5763.71,4138 v1(5825.96,4138)
  Bottom Layer w8: v1(5518,3835) ccw(c5518,3818) 5501,3818 5501,3661.8 ccw(c5557.69,3661.8) 5557.69,3605.12 U4.4@5566.14,3605.12
CAN1_TXD: U1.62 U4.1 | length 576.1
  Top Layer w8: v1(5535.87,3847.39) 5535.87,4017.2 cw(c5635.87,4017.2) 5635.87,4117.19 U1.62@5762.59,4117.19
  Bottom Layer w8: v1(5535.87,3847.39) 5535.87,3827.6 5535.87,3755.12 U4.1@5566.14,3755.12
CAN1H: CN3.1 R10.2 U4.7 | length 180.2
  Top Layer w8: v1(5354.92,3705.12) CN3.1@5454.1,3655.52
  Bottom Layer w8: R10.2@5289,3697.04 5346.84,3697.04 v1(5354.92,3705.12)
CAN1L: CN3.2 R10.1 U4.6 | length 180.1
  Bottom Layer w8: R10.1@5289,3662.96 5347.08,3662.96 U4.6@5354.92,3655.12 v1(5454.1,3704.72)
D+: D4.3 USB1.A6 USB1.B6 | length 186
  Top Layer w8: D4.3@6023.24,4623.4 ccw(c6023.24,4652.63) 6052.47,4652.63 USB1.B6@6052.47,4702.57 ; USB1.B6@6053.47,4702.3 6053.47,4718.46 cw(c6068.95,4718.46) 6062.22,4732.4 cw(c6067.25,4724.94) 6067.25,4733.94 6079.07,4733.94 cw(c6079.07,4720.16) 6092.84,4720.16 USB1.A6@6092.84,4702.3
D-: D4.1 USB1.A7 USB1.B7 | length 227.1
  Top Layer w8: D4.1@6037.13,4552.49 6049.74,4565.1 ccw(c5993.21,4621.64) 6073.16,4621.64 6073.16,4670.05 ; USB1.A7@6073.16,4702.3 6073.16,4670.05 ; USB1.B7@6112.53,4702.3 6112.53,4683.46 cw(c6099.73,4683.46) 6099.73,4670.66 6073.78,4670.66 6073.16,4670.05
DN: D4.6 U1.45 | length 119.3
  Top Layer w8: U1.45@5898.42,4448.94 5898.42,4514.26 cw(c5932.76,4514.26) D4.6@5932.76,4548.6
DP: D4.4 R18.1 U1.46 | length 270.4
  Top Layer w8: v1@5879.04,4384 5878.73,4384.31 U1.46@5878.73,4448.95 5878.73,4569.37 cw(c5932.76,4569.37) D4.4@5932.76,4623.4
  other v1: 5878.89,4384.16
DRV_EN: U1.34 U6.33 | length 980
  Top Layer w8: U1.34@6114.95,4448.94 6114.95,4472.09 cw(c6154.86,4472.09) 6142.09,4509.9 cw(c6154.86,4472.09) 6142.17,4509.93 cw(c6155.53,4467.88) 6142.27,4509.96 cw(c6144.65,4502.32) 6143.43,4510.23 6154.31,4511.91 cw(c6155.53,4504) 6155.53,4512 6672.96,4512 cw(c6672.96,4412) 6743.67,4482.71 6891.37,4335.02 cw(c6830.47,4274.12) 6916.59,4274.12 U6.33@6916.59,4253.07
Earth: *1.1 *2.1 *3.1 *4.1 R41.2 | length 205.6
  Bottom Layer w8: *4.1@7898.45,3254 *4.1@7898.45,3267.2
  Bottom Layer w30: R41.2@7706,3254 *4.1@7898.45,3254
GHA: Q1.4 U6.8 | length 780.8
  Top Layer w8: U6.8@6995.33,3979.47 6995.91,3978.89 6995.91,3954.21 v1(6997.13,3952.99)
  VCC w8: v1(6997.13,3952.99) ccw(c7060.79,4016.64) 7060.79,3926.62 7167.82,3926.62 cw(c7167.82,3867.32) 7209.75,3909.25 7251.55,3867.45 ccw(c7287.25,3903.14) 7287.25,3852.66 7615.45,3852.66 cw(c7615.45,3752.66) 7686.16,3823.37 v1(7702.94,3806.6)
GHB: Q2.4 U6.17 | length 656.8
  Top Layer w8: U6.17@7102.6,4086.74 7143.25,4086.74 7152.48,4095.97 v1(7154.58,4095.97)
  VCC w8: v1(7154.58,4095.97) 7314.29,4095.97 ccw(c7314.29,4231.79) 7366.27,4106.31 ccw(c7341.53,4166.03) 7387.24,4120.32 cw(c7453.9,4041.24) 7453.9,4144.67 7552.04,4144.67 cw(c7552.04,4044.67) 7622.75,4115.38 v1(7702.94,4035.2)
GHC: Q3.4 U6.18 | length 1004.2
  Top Layer w8: U6.18@7102.6,4106.43 7130.43,4106.43 v1(7157,4133)
  VCC w8: v1(7157,4133) 7279.58,4133 ccw(c7279.58,4233) 7350.29,4162.29 7497.71,4309.71 ccw(c7427,4380.42) 7527,4380.42 7527,4476.18 cw(c7572.82,4476.18) 7572.82,4522 7618.63,4522 ccw(c7618.63,4569.06) 7665.69,4569.06 7665.69,4641.97 cw(c7765.69,4641.97) 7694.98,4712.68 v1(7703.3,4721)
GLA: Q4.4 U6.10 | length 864.5
  Top Layer w8: U6.10@7034.7,3979.47 7034.7,3882.43 v1(7035,3882.13)
  VCC w8: v1(7035,3882.13) 7120.48,3796.65 ccw(c7175.16,3851.33) 7175.16,3774 7320,3774 cw(c7320,3674) 7420,3674 7420,3493.7 ccw(c7485.7,3493.7) v1(7485.7,3428)
GLB: Q5.4 U6.15 | length 407
  Top Layer w8: U6.15@7102.6,4047.37 7164.37,4047.37 7178.91,4061.91 v1(7179.99,4060.83)
  VCC w8: v1(7179.99,4060.83) 7391.1,4060.83 ccw(c7391.1,4160.83) 7461.82,4090.12 v1(7485.5,4113.8)
GLC: Q6.4 U6.20 | length 465.9
  Top Layer w8: U6.20@7102.6,4145.8 7114.64,4145.8 7119.81,4150.97 ; 7119.83,4150.97 7128.33,4159.47 ; 7128.33,4159.49 7244.77,4275.93 7244.77,4286.73 7257,4298.97 7272.03,4314 7468.65,4314 Q6.4@7485.5,4330.85
GND: C1.1 C2.2 C3.2 C4.2 C5.2 C6.2 C7.2 C8.2 C9.2 C10.2 C11.2 C12.2 C13.2 C14.2 C15.2 C16.1 C17.2 C18.1 C19.2 C20.1 C23.2 C25.1 C26.1 C27.1 C28.1 C33.1 C34.1 C35.2 C36.1 C37.1 C38.1 C39.1 C71.1 C72.1 CN2.5 CN2.7 CN2.8 CN3.3 CN3.4 D1.1 D4.2 LED1.2 LED2.2 LED3.2 R4.1 R9.1 R12.1 R14.2 R25.1 R26.1 SW1.1 SW1.4 SW2.1 SW2.4 SW3.1 SW3.4 SW4.1 SW4.4 SW5.1 SW5.4 U1.15 U1.27 U1.31 U1.47 U1.63 U2.3 U3.2 U4.2 U4.8 U5.2 U5.5 U5.7 U6.27 U6.35 U6.43 U6.49 USB1.1 USB1.2 USB1.3 USB1.4 USB1.A1B12 USB1.B1A12 X1.2 X1.4 X2.2 X2.5 X2.6 X3.2 X3.5 X3.6 X4.2 X4.5 X4.6
  other v1: 6451.92,3676.59 5566.14,3705.12 6451.52,3787.09 6497.89,3791.18 6598.07,3823.81 6938.54,3848 6303.71,3865.78 6596.29,3869.07 5825.89,3889 5964.49,3890 6303.71,3911.04 6223.46,3964 6294.77,3968.63 6962.25,4051.2 6993,4051.2 7023.75,4051.2 7054.5,4051.2 6932.55,4052.25 6931.5,4081.8 6962.25,4081.8 6993,4081.8 7023.75,4081.8 7054.5,4081.8 6901.87,4082.92 5691.81,4090.46 6900.75,4112.4 6931.5,4112.4 6962.25,4112.4 6993,4112.4 7023.75,4112.4 7054.5,4112.4 6900.75,4143 6931.5,4143 6962.25,4143 6993,4143 7023.75,4143 7054.5,4143 6900.75,4173.6 6931.5,4173.6 6962.25,4173.6 6993,4173.6 7023.75,4173.6 7054.5,4173.6 6900.75,4204.2 6931.5,4204.2 6962.25,4204.2 6993,4204.2 7023.75,4204.2 7054.5,4204.2 6332.49,4280 6566.17,4299 6854.46,4300 6391.35,4301 6334.27,4322 7050,4361 6269.81,4372.54 6533.03,4393 5804.81,4509.46 6023.24,4586 5683.91,4815.99 6482.41,4815.99 6866,4943.53 6736.5,4948 6802,4948
  other v2: 6172.55,3376.17 6491,3376.17 6271.02,3471.44 6682.91,3835.27
IIC_SCL: R6.1 U1.40 X2.3 | length 822.4
  Top Layer w8: U1.40@5996.84,4448.95 5996.84,4473.96 cw(c6023.36,4473.96) 6023.36,4500.47 6028.37,4500.47 ccw(c6028.37,4539.03) 6055.64,4511.77 6147.58,4603.71 cw(c6218.29,4533) 6218.29,4633 6414.28,4633 ccw(c6414.28,4733) 6484.99,4662.29 6529.7,4707 v1(6531,4707)
  Bottom Layer w8: v1(6531,4707) 6531.62,4707.62 v1(6531.62,4816) R6.1@6531.62,4879.54
IIC_SDA: R5.1 U1.41 X2.4 | length 854.7
  Top Layer w8: U1.41@5977.16,4448.95 5977.16,4480.28 cw(c6010.35,4480.28) 6010.35,4513.47 6024.66,4513.47 ccw(c6024.66,4548) 6049.07,4523.59 6142.19,4616.71 cw(c6212.91,4546) 6212.91,4646 6402,4646 ccw(c6402,4746) 6472.71,4675.29 6580.83,4783.41 X2.4@6580.83,4816 6580.83,4880.75 v1(6582,4881.92)
MIO: C40.2 C41.2 C42.2 R30.2 R32.2 R34.2 U1.8 U1.12 U1.14 | length 1114.3
  Top Layer w8: U1.8@5977.16,4001.05 5977.16,3959.84 ccw(c5997.64,3959.84) 5993.26,3939.83 cw(c5990.01,3906) 5996.3,3939.4 ccw(c5997.64,3959.84) 5997.64,3939.36 6002.28,3939.36 cw(c6002.28,3892.7) 6035.27,3925.69 R34.2@6086.96,3874 6086.96,3834.58 v1(6080.54,3828.16) ; U1.12@6055.9,4001.05 6055.9,3976.4 6060.67,3971.63 6060.67,3971.26 6138.3,3893.63 ccw(c6178.83,3934.16) 6178.83,3876.84 R32.2@6198.12,3876.84 6198.12,3841.63 C41.2@6190.7,3834.21 ; U1.14@6095.27,4001.05 6097.98,4003.76 6097.98,4053 6232.19,4053 cw(c6232.19,3999.33) v1(6270.15,4037.28) ; C41.2@6190.7,3831 v1(6192.47,3832.78) ; R30.2@6270.15,4039.05 6308.03,4039.05 C40.2@6314.21,4032.87
  VCC w8: v1(6080.54,3828.16) 6082.32,3829.93 6192.47,3829.93 v1(6192.47,3832.78) 6240.86,3881.16 ccw(c6170.15,3951.87) 6270.15,3951.87 v1(6270.15,4037.28)
NetC5_1: C5.1 R7.1 R8.2 R9.2
NetC16_2: C16.2 L2.2 U1.28 | length 155.4
  Top Layer w8: U1.28@6211.41,4294.36 6256.86,4294.36 cw(c6256.86,4245.32) C16.2@6291.54,4280 6291.54,4274.9 L2.2@6338.44,4228
NetC19_1: C19.1 L3.2 U1.29 | length 155.3
  Top Layer w8: U1.29@6211.41,4314.05 6272.34,4314.05 ccw(c6272.34,4341.2) C19.1@6291.54,4322 6342.44,4372.9 L3.2@6342.44,4374
NetC21_1: C21.1 U6.44 | length 52.3
  Top Layer w8: C21.1@6779.8,4094.27 6787.33,4086.74 U6.44@6829,4086.74
NetC21_2: C21.2 L1.1 U3.1 U6.45
NetC22_1: C22.1 U6.4 | length 102.3
  Top Layer w8: C22.1@6894,3885.54 6909.8,3901.34 ccw(c6893.41,3917.73) 6916.59,3917.73 U6.4@6916.59,3979.47
NetC22_2: C22.2 U6.3 | length 53.7
  Top Layer w8: C22.2@6894,3926.68 C22.2@6894,3928.46 ; C22.2@6896.9,3927.59 U6.3@6896.9,3979.47
NetC23_1: C23.1 U6.36 | length 66
  Top Layer w8: C23.1@6811.54,4300 6857.53,4254.01 U6.36@6857.53,4253.07
NetC24_2: C24.2 U6.5 | length 94.4
  Top Layer w8: U6.5@6936.27,3979.47 6936.27,3973.76 6936.27,3891.27 C24.2@6938.54,3889 C24.2@6938.54,3891.99
NetLED1_1: LED1.1 R1.1 | length 54.8
  Top Layer w8: R1.1@6799.5,4840.04 6800.5,4841.04 LED1.1@6800.5,4894.47
NetLED2_1: LED2.1 R2.1 | length 54.8
  Top Layer w8: R2.1@6734,4840.04 6735,4841.04 LED2.1@6735,4894.47
NetR11_1: R11.1 U6.48 | length 72.4
  Top Layer w8: R11.1@6828.8,3940.31 6828.8,3949.71 ccw(c6809.65,3949.71) 6823.19,3963.25 cw(c6830.57,3970.63) 6820.13,3970.63 6820.13,3986.59 cw(c6850.4,3986.59) U6.48@6829,4008
NetR12_2: R12.2 R13.2 U6.1 | length 146.3
  Top Layer w8: v1(6838.72,3978.47) 6839.71,3979.47 U6.1@6857.53,3979.47
  Bottom Layer w8: R13.2@6783.41,3895.89 6782.92,3895.89 R12.2@6782.92,3951 cw(c6810.39,3951) 6810.39,3978.47 v1(6838.72,3978.47)
NetR19_2: R19.2 U6.23 | length 291
  Top Layer w8: R19.2@7094,4438.81 cw(c7094,4382.81) 7150,4382.81 7150,4255.52 cw(c7113.01,4255.52) 7139.17,4229.36 7128.33,4218.53 7114.65,4204.85 U6.23@7102.6,4204.85
NetR20_2: R20.2 U6.24 | length 195.2
  Top Layer w8: R20.2@7093,4392.81 cw(c7093,4349.81) 7136,4349.81 7136,4262.59 cw(c7092.51,4262.59) 7123.26,4231.84 7118.79,4227.37
NetR21_2: R21.2 U6.25 | length 61.7
  Top Layer w8: U6.25@7074.07,4253.07 7074.07,4255.97 cw(c7148.95,4255.97) R21.2@7096,4308.92
NetR25_2: R25.2 USB1.B5 | length 91.4
  Top Layer w8: USB1.B5@6014.1,4702.3 6014.1,4723.88 6024.16,4733.94 6043.42,4733.94 6043.63,4733.73 6043.84,4733.94 6044.15,4733.94 6052.63,4742.41 v1(6052.63,4765.87)
NetR26_2: R26.2 USB1.A5 | length 89
  Top Layer w8: v1(6097.63,4765.87) 6097.63,4739.47 6103.16,4733.94 6122.16,4733.94 6132.21,4723.89 USB1.A5@6132.21,4702.3
NetR39_1: R39.1 X4.4 | length 84
  Top Layer w8: R39.1@5779.63,4733.13 5779.63,4813.3 X4.4@5782.33,4816
NetR40_1: R40.1 X4.3 | length 83.1
  Top Layer w8: X4.3@5733.12,4816 5733.63,4815.49 R40.1@5733.63,4733.13
NetR138_2: R138.2 U5.4 | length 45.2
  Top Layer w8: U5.4@6300.41,3749.51 6308.48,3741.45 R138.2@6308.48,3707.63
nFAULT: LED3.1 R3.1 U1.38 U6.28 | length 1747.3
  Top Layer w8: U1.38@6036.21,4448.95 6036.21,4473.6 6040.99,4478.38 6040.99,4478.74 6048.62,4486.37 cw(c6067.04,4467.95) 6067.04,4494 6084.02,4494 ccw(c6084.02,4534.68) 6112.78,4505.91 6115.14,4508.27 cw(c6155.53,4467.88) 6155.53,4525 6548.58,4525 ccw(c6548.58,4625) 6619.29,4554.29 6808.69,4743.69 ccw(c6740.33,4812.04) 6837,4812.04 cw(c6865,4812.04) R3.1@6865,4840.04 ; LED3.1@6866,4894.47 6866,4841.04 R3.1@6865,4840.04 ; U6.28@7015.01,4253.07 7015.01,4272.38 6999,4288.38 cw(c7037.64,4327.02) 6983,4327.02 6983,4740.04 ccw(c6883,4740.04) 6883,4840.04 R3.1@6865,4840.04
NRST: C28.2 R15.1 SW1.2 SW1.3 U1.7 | length 990.5
  Top Layer w8: SW1.3@5633.63,3415.83 v1(5854.1,3415.83) 5854.1,3554.1 cw(c5951,3554.1) 5951,3651 ccw(c5951,3711) 6011,3711 6011,3906 ccw(c5990.01,3906) 5990.01,3926.99 cw(c5990.01,3959.53) 5957.47,3959.53 U1.7@5957.47,4001.05
  Bottom Layer w8: R15.1@5794,3413.04 5854.1,3413.04 C28.2@5854.1,3417.61
PA4: C6.1 D1.3 R8.1 U1.18 | length 886.9
  Top Layer w8: v1(6145,4099.54) 6209.39,4099.54 U1.18@6211.41,4097.52
  Bottom Layer w8: v1(6145,4099.54) 6145,4078 ccw(c6214.07,4078) 6214.07,4008.93 cw(c6214.07,3957) 6266,3957 6266,3686.04 ccw(c6366,3686.04) 6366,3586.04 D1.3@6489.32,3586.04 6489.32,3578 R8.1@6537.92,3578
PB0: C38.2 R27.1 SW4.2 SW4.3 U1.24 | length 1246.4
  Top Layer w8: v1(6063.36,4171.64) 6107.35,4215.62 U1.24@6211.41,4215.62 ; v1(6270.57,3523.44) 6489.39,3523.44 SW4.2@6491,3521.83
  Bottom Layer w8: v1(6063.36,4171.64) 6055.9,4164.18 6055.9,3661.87 ccw(c6139.77,3661.87) 6139.77,3578 6216.01,3578 cw(c6216.01,3523.44) v1(6270.57,3523.44) 6312.6,3523.44 R27.1@6320,3516.04
PB1: C39.2 R28.1 SW5.2 SW5.3 U1.25 | length 1425.6
  Top Layer w8: v1(6038.03,4154) 6039.51,4155.48 6039.51,4173.06 6055.96,4189.51 6056.51,4189.51 6102.31,4235.31 U1.25@6211.41,4235.31 ; v1(6270.53,3309.83) v1(6491,3309.83)
  Bottom Layer w8: v1(6038.03,4154) 6038.03,3633.4 ccw(c6138.03,3633.4) 6067.32,3562.68 6241.24,3388.76 cw(c6170.53,3318.05) 6270.53,3318.05 v1(6270.53,3309.83) 6318.21,3309.83 R28.1@6324,3304.04
PC4: C36.2 R16.1 SW2.2 SW2.3 U1.22 | length 1090.7
  Top Layer w8: v1(5952.08,3521.83) SW2.2@6172.55,3521.83 ; v1(6002.28,4066) 6016.66,4080.38 6021.66,4080.38 6117.53,4176.26 U1.22@6211.41,4176.26
  Bottom Layer w8: v1(5952.08,3521.83) 5999.21,3521.83 R16.1@6003,3518.04 ; C36.2@5952.08,3531.68 5952.08,3570.08 cw(c5979,3570.08) 5979,3597 ccw(c5979,3620.28) 6002.28,3620.28 v1(6002.28,4066)
PC5: C37.2 R17.1 SW3.2 SW3.3 U1.23 | length 1370.6
  Top Layer w8: v1(5952.08,3309.83) SW3.2@6172.55,3309.83 ; v1(6020.15,4109) 6020.34,4109 6034.3,4122.96 6039.96,4122.96 6112.94,4195.94 U1.23@6211.41,4195.94
  Bottom Layer w8: R17.1@6004,3303.04 5997.21,3309.83 v1(5952.08,3309.83) 6053.14,3410.89 ccw(c5982.43,3481.61) 6082.43,3481.61 6082.43,3489 ccw(c5994.14,3489) 6056.57,3551.43 6038.43,3569.57 cw(c6082.54,3613.69) 6020.15,3613.69 v1(6020.15,4109)